# EAGLE board lungmate (EAGLE 5.06)
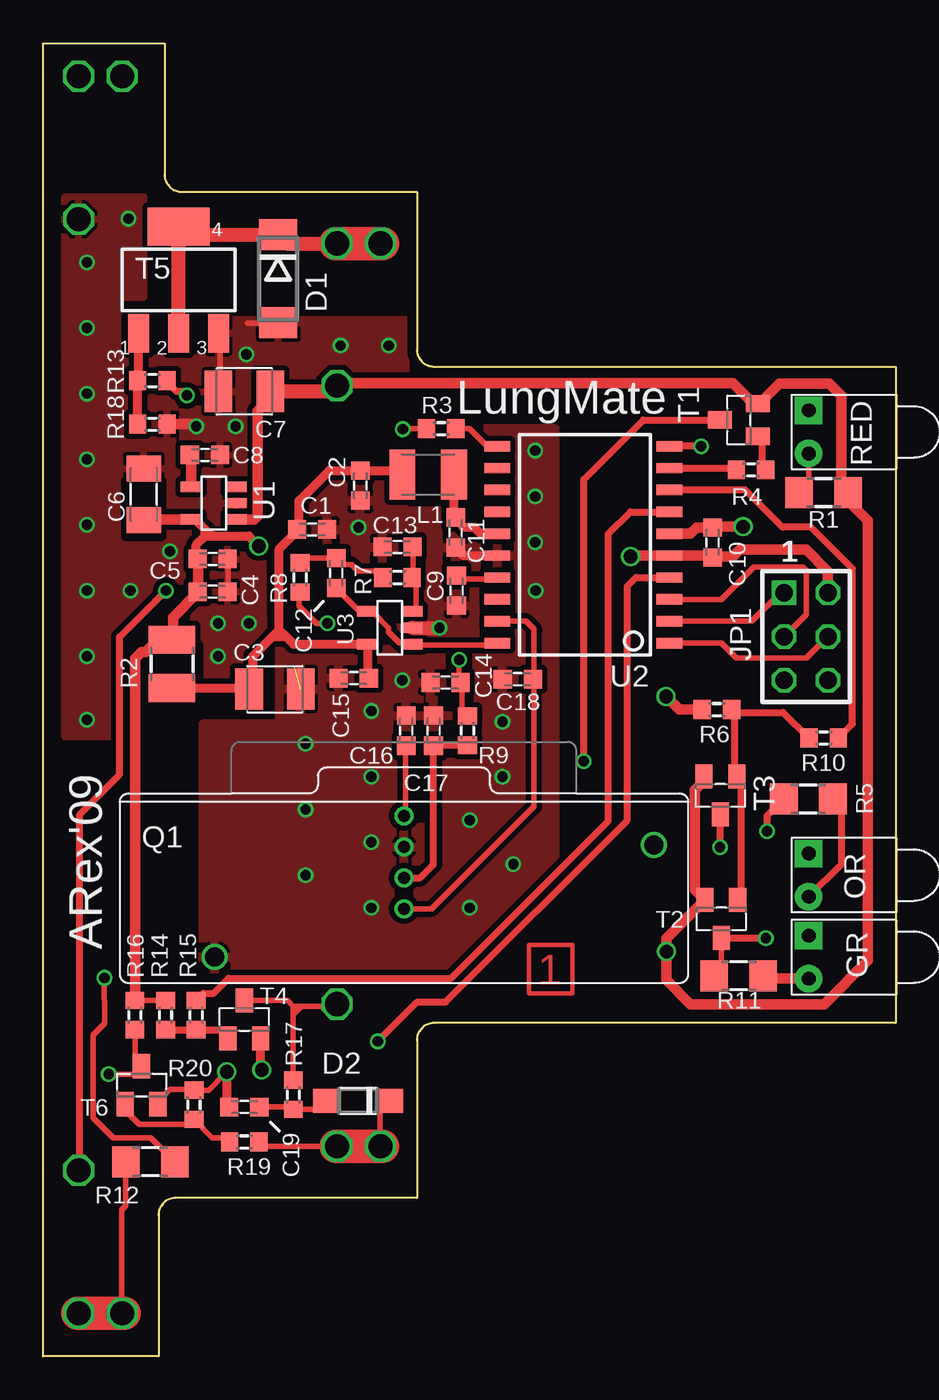
[diagram p0: board, top side]
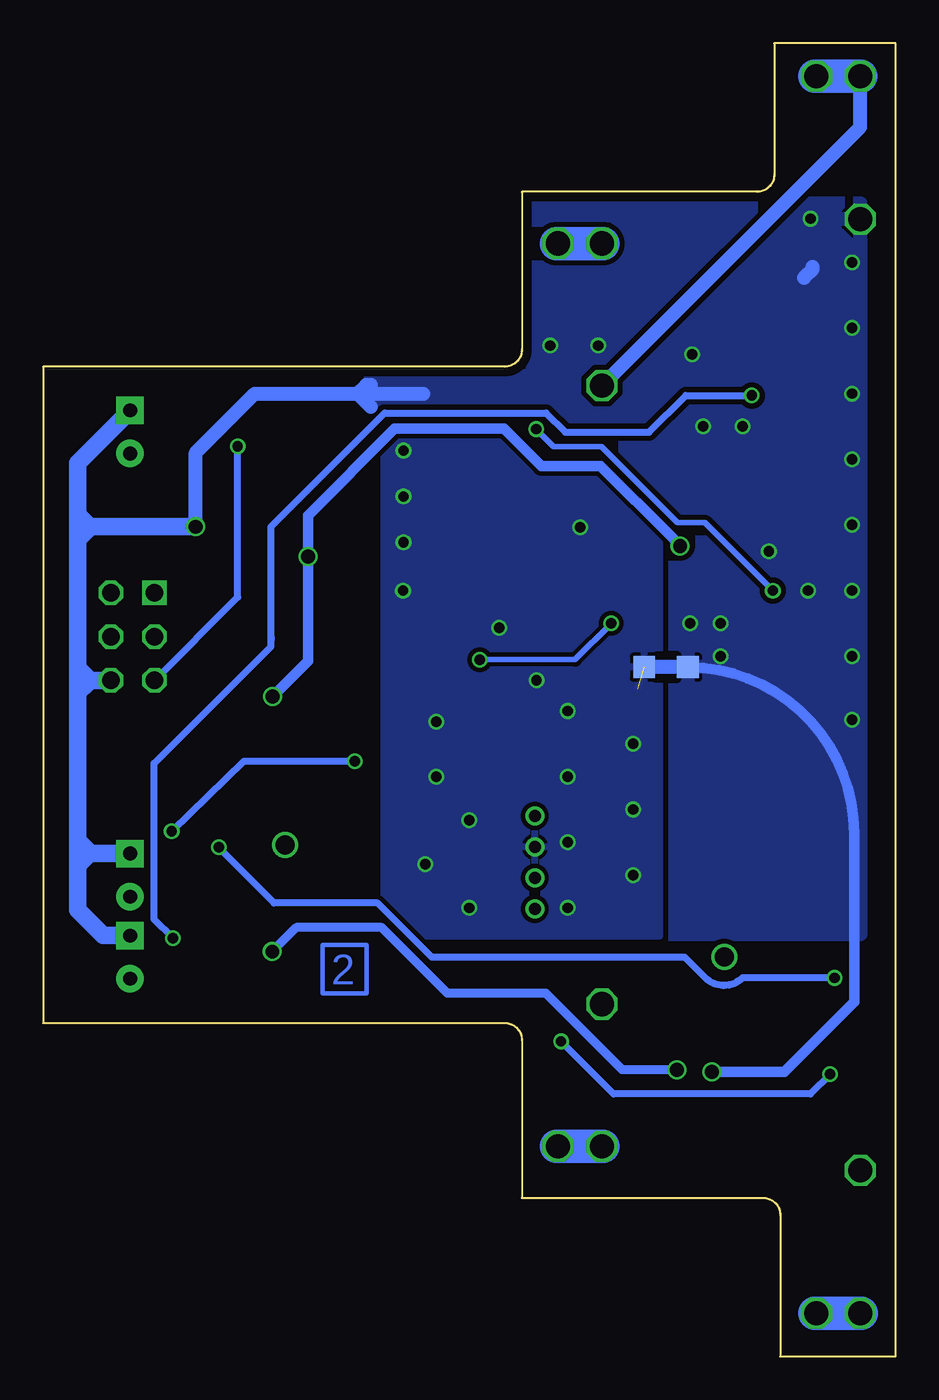
[diagram p1: board, bottom side, seen from below]

Size 49.5 x 76.21 mm. Coordinates in mm from the lower left corner, seen from the top.
Copper layers (1*16): Top 0.035mm / dielectric 1.5mm / Bottom 0.035mm
Design rules "PCB-POOL": minimum track width 6mil, minimum drill 12mil, track to track 6mil, track to pad 6mil, pad to pad 6mil, via to via 6mil, smd to smd 6mil, copper to edge 20mil, drill to drill 8mil, minimum pad ring 8mil, minimum via ring 6mil, stop-mask expansion 3mil, vias tented up to drill 0mil, thermal gap 8mil
tRestrict: area 21.3,49.7 to 23.4,51.9; area 7,39 to 9,41.3; area 4.8,47.6 to 6.9,50.8

## Footprints (pad centres in the part's own frame; a part is rotated, then mirrored left to right if it is on the bottom)
C0603K = smd 1.05 x 1.08: 1 -0.875,0; 2 0.875,0
SMC_B = smd 1.6 x 2.4: + -1.5,0; - 1.5,0
C1206K = smd 1.5 x 2: 1 -1.5,0; 2 1.5,0
DO214AA = smd 1.8 x 2.2: A 2.55,0; C -2.55,0
SOD123 = smd 1.4 x 1.4: A 1.9,0; C -1.9,0
AVR-ISP-6 = drill 1.016 square: 1 -2.54,-1.27 | drill 1.016 octagon: 2 -2.54,1.27; 3 0,-1.27; 4 0,1.27; 5 2.54,-1.27; 6 2.54,1.27
91.201 = drill 1.4 octagon: R1.1 2.06,66; R1.2@1 2.06,74.3; R1.2@2 4.6,74.3; R2.1 17.06,56.35; R2.2@1 17.06,64.6; R2.2@2 19.6,64.6; R3.1 17.06,20.45; R3.2@1 17.06,12.2; R3.2@2 19.6,12.2; R4.1 2.06,10.8; R4.2@1 2.06,2.5; R4.2@2 4.6,2.5
C1210K = smd 1.5 x 2.9: 1 -1.5,0; 2 1.5,0
H13X = drill 0.8 pad 1.6 round: A 1.25,0 | drill 0.8 pad 1.6 square: K -1.25,0
HAIS-P = drill 0.7 round: 1 0,8.2; 2 0,6.4; 3 0,4.6; 4 0,2.8 | drill 1.1 round: 5 -11,0; 6 14.5,6.5
R1206 = smd 1.6 x 1.803: 1 -1.422,0; 2 1.422,0
R1210 = smd 1.6 x 2.7: 1 -1.4,0; 2 1.4,0
R0603 = smd 1 x 1.1: 1 -0.85,0; 2 0.85,0
SOT23-BEC = smd 1 x 1.4: B -0.95,-1.1; C 0,1.1; E 0.95,-1.1
SOT223 = smd 1.219 x 2.235: 1 -2.311,-3.099; 2 0,-3.099; 3 2.311,-3.099 | smd 3.6 x 2.2: 4 0,3.099
SOT23 = smd 1 x 1.4: 1 -0.95,-1.1; 2 0.95,-1.1; 3 0,1.1
SOT23-5 = smd 0.6 x 1.2: 1 -0.95,-1.306; 2 0,-1.306; 3 0.95,-1.306; 4 0.95,1.306; 5 -0.95,1.306
SOIC20S = smd 0.6 x 1.5: 1 -5.715,-5; 2 -4.445,-5; 3 -3.175,-5; 4 -1.905,-5; 5 -0.635,-5; 6 0.635,-5; 7 1.905,-5; 8 3.175,-5; 9 4.445,-5; 10 5.715,-5; 11 5.715,5; 12 4.445,5; 13 3.175,5; 14 1.905,5; 15 0.635,5; 16 -0.635,5; 17 -1.905,5; 18 -3.175,5; 19 -4.445,5; 20 -5.715,5
GND-GNDA = smd 1.27 x 1.27: GND -1.27,0; GNDA 1.27,0

## Placement (x,y rotation side)
C1  100p  [C0603K]  15.62,48.01 0 top
C2  100n  [C0603K]  18.41,50.55 270 top
C3  33u 6.3V  [SMC_B]  13.46,38.73 0 top
C4  100p  [C0603K]  9.84,44.39 0 top
C5  100n  [C0603K]  9.84,46.29 0 top
C6  10u 16V  [C1206K]  5.84,50.04 90 top
C7  10u 16V  [SMC_B]  11.68,56.01 180 top
C8  4n7  [C0603K]  9.4,52.32 0 top
C9  47n  [C0603K]  24,44.45 270 top
C10  1u  [C0603K]  38.86,47.24 270 top
C11  100n  [C0603K]  23.95,47.83 270 top
C12  100n  [C0603K]  17.02,45.47 90 top
C13  10n  [C0603K]  20.57,46.99 180 top
C14  68n  [C0603K]  23.37,39.12 180 top
C15  100n  [C0603K]  18.03,39.37 180 top
C16  47n  [C0603K]  21.08,36.32 90 top
C17  4n7  [C0603K]  22.67,36.32 90 top
C18  47n  [C0603K]  27.56,39.31 180 top
C19  100n  [C0603K]  11.68,14.48 180 top
D1  GA1  [DO214AA]  13.65,62.55 270 top
D2  BAT54  [SOD123]  18.29,14.83 180 top
JP1  AVR-ISP-6  [AVR-ISP-6]  44.3,41.78 270 top
K1  91.201  [91.201]  0,0 0 top
L1  10u  [C1210K]  22.35,51.18 0 top
LED1  on/off  [H13X]  44.45,53.66 270 top
LED2  mode  [H13X]  44.45,27.94 270 top
LED3  relay  [H13X]  44.45,23.18 270 top
Q1  HAIS-50P  [HAIS-P]  20.95,23.18 0 top
R1  680  [R1206]  45.31,50.14 180 top
R2  10 1/4W  [R1210]  7.49,40.2 270 top
R3  330  [R0603]  23.11,53.85 180 top
R4  10k  [R0603]  41.1,51.46 0 top
R5  680  [R1206]  44.42,32.36 0 top
R6  100k  [R0603]  39.12,37.54 180 top
R7  42k2  [R0603]  20.57,45.21 0 top
R8  47k5  [R0603]  14.92,45.21 90 top
R9  29k4  [R0603]  24.64,36.32 90 top
R10  10k  [R0603]  45.31,35.89 180 top
R11  680  [R1206]  40.39,22.1 0 top
R12  680  [R1206]  6.22,11.3 180 top
R13  10k  [R0603]  6.35,56.64 0 top
R14  100k  [R0603]  7.11,19.81 90 top
R15  10k  [R0603]  8.89,19.81 90 top
R16  10k  [R0603]  5.33,19.81 90 top
R17  4k7  [R0603]  14.53,15.19 90 top
R18  100k  [R0603]  6.35,54.1 0 top
R19  10k  [R0603]  11.68,12.45 0 top
R20  100k  [R0603]  8.76,14.61 270 top
T1  BC857  [SOT23-BEC]  40.39,54.36 90 top
T2  BC857  [SOT23-BEC]  39.37,25.4 180 top
T3  BC857  [SOT23-BEC]  39.32,32.56 180 top
T4  BC857  [SOT23-BEC]  11.68,19.56 0 top
T5  BCP54  [SOT223]  7.87,62.48 0 top
T6  BC848  [SOT23]  5.71,15.75 0 top
U1  MIC5205U  [SOT23-5]  9.91,49.53 90 top
U2  ATtiny861  [SOIC20S]  31.37,47.12 90 top
U3  MCP6001  [SOT23-5]  20.13,42.29 90 top
~NUDEV~1  GND-GNDA  [GND-GNDA]  13.34,40.01 180 bottom

## Library data of the parts
C1-C11 C15-C19 L1 R1-R20 = rcl
C12 C13 = rcl; TOL: 5%
C14 = rcl; DIE: X7R; TOL: 5%
D1 D2 = diode
JP1 U2 = avr-4
K1 = altech
LED1-LED3 = led
Q1 = lem
T1-T4 = transistor-pnp
T5 T6 = transistor
U1 = micrel
U3 = burr-brown
~NUDEV~1 = supply1

## Nets
!RESET: JP1.5 U2.10
+5V: C1.1 C2.1 C3.+ C15.1 L1.1 R2.2 U3.5
+12V: C7.+ K1.R1.2@1 K1.R2.1 R1.1 T1.E T2.E T3.E T4.E U1.1
CS_REF: C18.1 Q1.4 U2.19
DATA_IN: R15.2 U2.7
DATA_OUT: R16.1 T6.3 U2.4
EXT_LED: K1.R4.2@1 R12.2
EXT_SW: K1.R4.1 R3.2
FILTERED_SIGNAL: C12.1 U2.20 U3.1 U3.4
GND: C4.2 C5.2 C6.2 C7.- C8.2 C10.1 C19.2 D1.A JP1.6 K1.R1.1 LED1.K LED2.K LED3.K R18.2 R20.1 T5.3 T6.2 U1.2 U2.6 ~NUDEV~1.GND
GNDA: C1.2 C2.2 C3.- C9.2 C11.2 C13.2 C14.2 C15.2 C16.2 C17.2 C18.2 Q1.2 Q1.5 U2.16 U3.2 ~NUDEV~1.GNDA
MISO: JP1.1 U2.2
MOSI: JP1.4 U2.1
N$1: R10.1 U2.8
N$2: C19.1 D2.A R17.1
N$3: R14.1 R15.1 T4.B
N$4: C17.1 Q1.3 R9.1
N$5: C16.1 Q1.1
N$6: C14.1 R8.1 R9.2
N$7: C12.2 R7.1 R8.2
N$8: C13.1 R7.2 U3.3
N$9: C11.1 L1.2 U2.15
N$10: R12.1 T3.C
N$11: C9.1 U2.17
N$12: LED1.A R1.2
N$13: R4.2 T1.B
N$14: R6.1 R10.2 T2.B T3.B
N$16: LED2.A R5.2
N$17: R4.1 U2.9
N$18: R19.1 R20.2 T6.1
N$19: R3.1 U2.11
N$20: R5.1 T1.C
N$21: LED3.A R11.2
N$22: C8.1 U1.4
N$25: R11.1 R13.2 T2.C
RELAY_COIL: D1.C K1.R2.2@1 T5.2 T5.4
RELAY_CTRL: R13.1 R18.1 T5.1
SCK: JP1.3 U2.3
SERIAL_IN: D2.C K1.R3.2@1 R19.2
SERIAL_OUT: K1.R3.1 R17.2 T4.C
VCC: C4.1 C5.1 C6.1 C10.2 JP1.2 R2.1 R6.2 R14.2 R16.2 U1.5 U2.5

## Tracks (layer width: path | path; a pad name or v marks a point on that pad's centre or on a via)
!RESET  (via drill 0.6)
  Top 0.406: v38.2,52.83 U2.10
  Bottom 0.406: v38.2,52.83 38.2,44.07 JP1.5
+5V
  Top 0.305: 18.97,41.22 19.05,41.3 U3.5 | 11.96,38.79 C3.+ 11.81,38.79 | R2.2 7.62,38.79
  Top 0.508: 7.62,38.79 11.91,38.79 C3.+ 11.94,38.76 11.94,39.37 12.19,39.37 12.19,40.64 13.34,41.78 | 13.72,42.16 13.97,41.91 | 13.72,42.16 14.1,41.78 | 14.1,41.78 14.54,41.34 U3.5 18.82,39.46 C15.1 | 13.72,42.16 13.72,46.86 14.75,47.89 C1.1 14.86,48.12 14.86,49.66 16.62,51.42 C2.1 20.61,51.42 L1.1 | 13.34,41.78 13.72,42.16 | 13.34,41.78 14.1,41.78
+12V  (via drill 0.8)
  Top 0.305: T4.E 12.63,18.56
  Top 0.406: 41.84,55.56 T1.E 40.98,55.56 | 46.33,50.31 R1.1 46.25,50.14 | 17.2,56.49 K1.R2.1 | 38.1,26.18 T2.E
  Top 0.508: T4.E 12.63,17.08 v12.7,16.64
  Top 0.61: T3.E 38.42,33.61 38.42,33.44 37.85,32.87 37.85,27.07 T2.E | 41.84,55.56 42.75,56.46 45.64,56.46 46.33,55.78 46.33,50.31 | 40.98,55.56 40.06,56.49 17.2,56.49 | U1.1 12.26,48.58 12.45,48.77 12.45,54.86 12.95,55.37 12.95,55.78 C7.+ | 46.25,50.14 47.88,48.51 47.88,22.99 45.34,20.45 37.59,20.45 36.2,21.84 v36.2,23.5 36.2,24.27 38.1,26.18
  Top 0.813: C7.+ 16.72,56.01 K1.R2.1
  Bottom 0.508: v12.7,16.64 15.88,16.64 20.32,21.08 26.04,21.08 29.84,24.89 34.8,24.89 v36.2,23.5
  Bottom 0.813: K1.R1.2@1 2.06,71.35 K1.R2.1
CS_REF
  Top 0.305: U2.19 28.04,42.67 28.5,42.22 28.5,39.32 C18.1 28.5,39.17 28.5,31.93 22.55,25.98 Q1.4
DATA_IN
  Top 0.406: R15.2 9.31,21.08 9.91,21.08 10.77,21.95 23.67,21.95 32.82,31.09 32.82,47.75 34.09,49.02 U2.7
DATA_OUT  (via drill 0.6)
  Top 0.305: R16.1 5.33,17.23 T6.3 5.25,16.38 v3.81,16.38
  Top 0.406: U2.4 34.42,45.21 33.91,44.7 33.91,31.11 23.37,20.57 21.72,20.57 v19.43,18.29
  Bottom 0.406: v19.43,18.29 16.38,15.24 4.95,15.24 v3.81,16.38
EXT_LED
  Top 0.305: K1.R4.2@1 4.53,2.5 4.57,2.54 4.57,8.51 4.8,8.74 R12.2
EXT_SW  (via drill 0.6)
  Top 0.305: K1.R4.1 2.13,10.82 | v20.88,53.82 20.9,53.85 R3.2
  Top 0.406: 2.13,10.82 2.13,31.47 4.45,33.78 4.45,41.76 v7.14,44.45
  Bottom 0.305: v7.14,44.45 11.07,48.39 12.68,48.39 17.09,52.81 19.86,52.81 v20.88,53.82
FILTERED_SIGNAL
  Top 0.305: 17.07,44.58 C12.1 18.33,43.28 19.05,43.28 U3.4 19.12,43.24 20.07,42.29 20.07,42.04 20.7,41.4 21.38,41.4 U3.1 21.72,41.3 26.29,41.3 26.36,41.38 U2.20
GND  (via drill 0.6, 0.8 pad 1)
  Top 0.305: 11.89,59.97 13.64,59.97 D1.A | R18.2 7.16,54.1 | C6.2 6.4,51.59 | 10.21,56.01 C7.- 10.29,56.08 10.29,59.36 | C4.2 10.74,44.42 10.74,46.25 C5.2 | 38.9,48.16 C10.1 | T6.2 6.67,14.79 7.37,15.49 8.72,15.49 R20.1 9.61,15.46 v10.67,16.51
  Top 0.508: v10.67,16.51 10.67,14.62 C19.2
  Top 0.61: v40.64,48.16 38.9,48.16 | 10.27,55.92 C7.- 10.18,55.65 | R18.2 8.64,54.1 | C10.1 37.96,48.12 37.59,47.75 U2.6
  Bottom 0.61: v10.67,16.51 6.48,16.51 2.41,20.57 2.41,30.35 arc-90 ~NUDEV~1.GND | 47.5,28.19 46.48,29.21 47.5,30.23 | 47.62,38.1 46.48,39.24 47.37,40.13 | 47.5,47.12 46.48,48.13 47.5,49.15
  Bottom 0.813: 31.24,55.88 37.21,55.88 40.64,52.45 v40.64,48.16 | 31.24,55.88 27.43,55.88 | 4.83,63.25 4.83,63.12 5.33,62.61 | 31.24,55.88 30.48,55.12 | 31.24,55.88 30.73,56.39 30.48,56.39 | ~NUDEV~1.GND 14.48,40.01
  Bottom 1.016: LED3.K 46.02,24.43 47.5,25.91 47.5,28.19 47.5,29.46 | 47.5,29.46 47.5,30.23 47.5,39.37 | 47.5,39.37 47.5,47.12 47.5,48.01 | 47.5,48.01 47.5,49.15 47.5,51.86 LED1.K | LED2.K 47.22,29.19 47.5,29.46 | JP1.6 46.48,39.24 47.37,39.24 47.5,39.37 | v40.64,48.16 47.35,48.16 47.5,48.01
  other vias: 10.16,40.64 17.27,58.67 20.07,58.67 5.08,44.45 11.94,42.55 10.16,42.55 8.89,53.98 7.37,46.74 11.81,58.17 11.18,53.98 2.54,55.88 2.54,52.07 2.54,59.69 2.54,48.26 4.95,66.04 2.54,36.96 2.54,40.64 2.54,63.5 2.54,44.45
  pour Bottom (isolate 0.3, rank 2): 2.03,24.51 2.03,66.93 21.08,66.8 21.08,56.9 30.48,56.9 30.48,24.51
  pour Top (isolate 0.305): 1.27,57.91 10.16,58.04 10.03,60.2 21.08,60.2 21.08,55.24 12.7,55.24 12.83,37.72 8.13,37.72 8.13,35.94 1.27,35.94
  pour Top (isolate 0.305): 1.27,67.31 5.84,67.31 5.84,61.47 4.32,61.47 4.32,58.04 1.27,58.04
GNDA  (via drill 0.6)  (1 unrouted)
  Top 0.508: C11.2 23.91,46.95 24.38,46.48 U2.16
  Top 0.813: U3.2 v23.01,42.29
  other vias: 19.05,37.47 26.67,36.83 20.85,39.24 15.24,31.75 15.24,35.56 19.05,33.66 19.05,29.84 19.05,26.04 24.77,31.11 24.77,26.04 27.3,28.57 26.67,33.66 28.57,49.91 28.57,52.58 18.31,48.13 15.24,27.94 28.57,47.24 28.6,44.45
  pour Bottom (isolate 0.254): 13.72,24.38 29.72,24.38 29.72,53.47 13.72,53.47
  pour Top (isolate 0.305): 9.27,22.48 29.72,22.35 29.72,53.85 13.72,53.85 13.72,36.7 9.27,36.7
MISO
  Top 0.305: U2.2 41.15,42.67 42.8,44.32 JP1.1
MOSI
  Top 0.305: JP1.4 44.32,40.54 40.23,40.54 39.37,41.4 U2.1
N$1
  Top 0.406: R10.1 46.99,36.72 46.99,45.72 44.58,48.13 42.93,48.13 40.77,50.29 U2.8
N$2
  Top 0.305: C19.1 14.39,14.48 R17.1 16.69,14.34 D2.A
N$3
  Top 0.406: R14.1 R15.1 10.48,18.96 T4.B
N$4
  Top 0.305: R9.1 24.61,35.43 22.71,35.43 C17.1 22.71,35.28
  Top 0.406: Q1.3 21.89,27.78 22.66,28.55 22.66,35.43 C17.1
N$5
  Top 0.305: C16.1 21.03,35.43 21.03,31.47 20.95,31.39 Q1.1
N$6  (via drill 0.6, 0.6 pad 0.6)
  Top 0.305: R9.2 24.61,37.19 24.31,37.49 24.31,39.09 C14.1 24.16,39.24 v24.16,40.44 | R8.1 14.86,44.58 14.86,43.56 15.88,42.55 v16.51,42.55
  Bottom 0.305: v24.16,40.44 18.62,40.44 v16.51,42.55
N$7
  Top 0.305: C12.2 16.99,46.33 14.86,46.33 R8.2 | C12.2 16.99,46.18 | C12.2 17.02,46.23 17.27,45.97 17.91,45.97 18.29,45.59 19.34,45.59 R7.1
N$8
  Top 0.305: C13.1 21.49,46.97 21.49,45.26 R7.2 21.64,45.26 21.64,43.28 U3.3
N$9
  Top 0.508: U2.15 25.4,47.75 25.02,48.13 24.39,48.13 C11.1 23.85,48.8 L1.2
N$10  (via drill 0.6)
  Top 0.305: v3.56,21.97 3.58,19.33 2.92,18.67 2.92,13.84 4.06,12.7 6.25,12.7 R12.1
  Top 0.406: T3.C 39.32,29.67 v39.29,29.57
  Bottom 0.406: v39.29,29.57 39.34,29.57 36.09,26.31 30.07,26.31 26.92,23.16 12.24,23.16 11.07,22 arc-90 8.89,21.97 v3.56,21.97
N$11
  Top 0.305: C9.1 23.93,45.11 26.29,45.11 26.36,45.19 U2.17
N$12
  Top 0.305: LED1.A 44.45,50.7 R1.2
N$13
  Top 0.406: R4.2 41.76,51.46 41.76,53.64 T1.B
N$14
  Top 0.305: T2.B 40.4,26.58 | T3.B 40.17,33.76
  Top 0.406: R10.2 42.95,37.39 40.12,37.39 | 40.4,26.58 40.4,26.79 40.54,26.92 40.54,33.39 T3.B | 40.17,33.76 40.17,37.34 40.12,37.39 | 40.12,37.39 R6.1
N$16
  Top 0.406: LED2.A 46.35,28.59 46.35,32.13 46.13,32.36 R5.2
N$17
  Top 0.406: U2.9 40.15,51.56 arc-90 R4.1
N$18
  Top 0.305: R19.1 10.58,12.7 9.82,12.7 R20.2 8.72,13.46 5.59,13.46 4.76,14.29 T6.1
N$19
  Top 0.305: 26.36,52.88 U2.11 25.78,52.83 24.77,53.85 R3.1
N$20  (via drill 0.6)
  Top 0.406: T1.C 34.85,54.36 31.39,50.9 v31.39,34.54 | R5.1 42.04,31.39 v42.04,30.48
  Bottom 0.406: v31.39,34.54 37.85,34.54 v42.04,30.48
N$21
  Top 0.61: LED3.A 41.98,21.93 R11.2
N$22
  Top 0.61: U1.4 8.6,52.15 C8.1
N$23
  Bottom 1.93: 2.03,74.3 4.7,74.3
N$24
  Bottom 1.93: 17,64.6 19.7,64.6
N$25  (via drill 0.6)
  Top 0.305: T2.C 39.37,22.26 R11.1
  Top 0.406: 7.2,56.6 R13.2 7.2,56.55 7.75,56.01 8.13,56.01 v8.36,55.78 | v41.96,24.28 39.39,24.28 T2.C
  Bottom 0.406: v8.36,55.78 12.19,55.78 14.33,53.65 19.18,53.65 20.3,54.76 29.67,54.76 36.27,48.16 36.27,41.78 | 36.27,41.78 36.27,41.55 | v41.96,24.28 43.05,25.38 43.05,34.42 36.27,41.2 36.27,41.78
N$26
  Bottom 1.93: 17,12.2 19.7,12.2
N$27
  Bottom 1.93: 2,2.5 4.7,2.5
N$28
  Top 1.93: 16.97,64.6 19.7,64.6
N$29
  Top 1.93: 17,12.2 19.7,12.2
N$30
  Top 1.93: 2,2.5 4.7,2.5
N$32
  Top 0.254: 28.19,21.08 28.19,23.88 30.73,23.88 30.73,21.08 28.19,21.08
N$33
  Bottom 0.254: 30.73,21.08 30.73,23.88 33.27,23.88 33.27,21.08 30.73,21.08
RELAY_COIL
  Top 0.305: 13.72,65.08 D1.C 13.56,65.08
  Top 0.813: D1.C 13.63,65.08 | T5.2 T5.4 8.36,65.1 D1.C | K1.R2.2@1 14.15,64.6 D1.C
RELAY_CTRL
  Top 0.305: R18.1 5.49,54.1 | 5.49,56.62 R13.1 5.56,56.77
  Top 0.508: 5.49,54.1 5.49,56.62 | 5.56,56.77 T5.1
SCK
  Top 0.305: JP1.3 44.3,43.05 44.3,45.62 44.09,45.82 41.25,45.82 39.37,43.94 U2.3
SERIAL_IN
  Top 0.305: R19.2 12.78,12.2 K1.R3.2@1 19.56,12.19 19.56,14.22 19.68,14.35 19.68,14.73 20.09,14.73 D2.C
SERIAL_OUT
  Top 0.305: T4.C 14.19,20.66 14.53,20.32 | 14.53,20.32 14.99,20.32 | 14.99,20.32 16.93,20.32 K1.R3.1 | R17.2 14.53,20.32 | 14.99,20.32 14.58,19.91
VCC  (via drill 0.8)
  Top 0.305: 38.75,46.48 C10.2 | 8.99,44.42 C4.1 8.91,44.27 | 8.99,46.25 C5.1 | R2.1 7.54,41.6 | R16.2 R14.2
  Top 0.406: C10.2 38.92,46.43 | R2.1 7.35,41.45
  Top 0.508: v12.52,47.04 11.94,47.62 9.91,47.62 | 9.91,47.62 9.78,47.62 9.53,47.88 | 9.4,48.01 9.53,47.88 | 9.4,48.01 8.82,48.58 U1.5 | C5.1 8.97,46.43 8.89,46.51 8.89,47.12 9.4,47.62 | 9.4,47.62 9.53,47.75 9.53,47.88 | 9.4,47.62 9.4,48.01 | 9.4,47.62 9.91,47.62
  Top 0.61: 38.75,46.48 U2.5 34.19,46.48 arc-90 v34.11,46.43 | 8.99,44.42 8.99,46.25 | 7.54,41.6 7.54,42.9 8.91,44.27 | 38.92,46.43 40.03,46.43 40.44,46.84 44.3,46.84 45.57,45.57 JP1.2 | v36.17,38.3 36.93,37.54 R6.2 | R16.2 5.33,40.51 5.71,40.89 5.97,40.89 6.48,41.4 7.3,41.4 R2.1 | U1.5 6.1,48.58 C6.1
  Bottom 0.61: v36.17,38.3 34.11,40.36 v34.11,46.43 34.11,48.82 29.08,53.85 22.73,53.85 20.57,51.69 17.14,51.69 13.01,47.55 v12.52,47.04

## Text on the board
Top: 1
Bottom: 2
tPlace: RED | 1 | OR | GR
tNames: LungMate | ARex'09
Measures: 3" [76.2mm] | [49.5mm]
tDocu: ARex'09